# Altium PCB DRV8313.PcbDoc
Units mil, origin at the board's own origin, x right, y up, seen from the top; angles counter-clockwise.
Board outline 1771.56 x 1554.12 mil, 4 copper layers (Top Layer, VCC-2, GND-3, Bottom Layer), stack 46.063 mil thick; 72 components, 69 nets, 282 pads, 243 vias.
Unrouted connection lines stored in the file: 193.
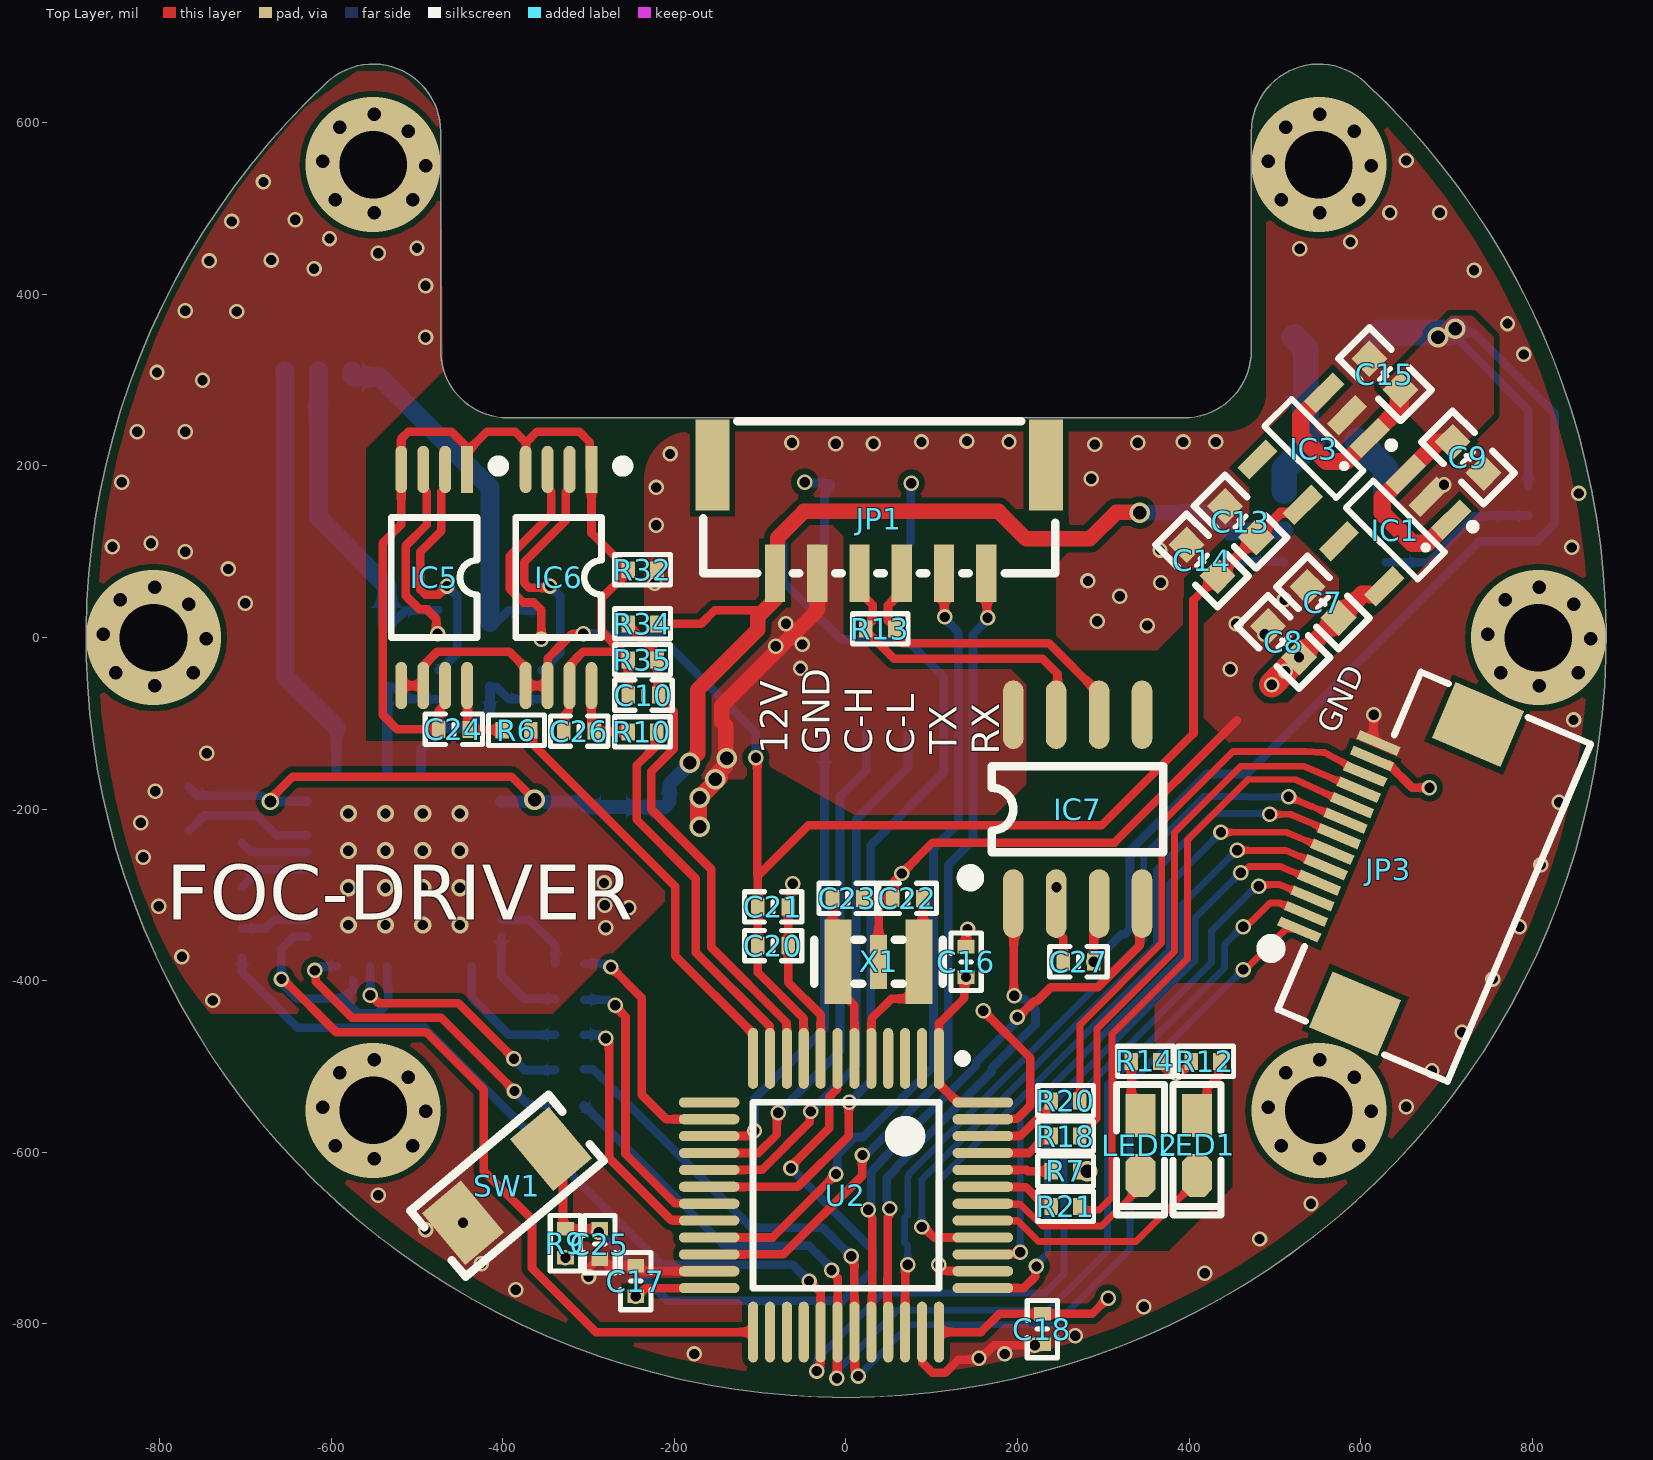
[diagram p0: Top Layer view]
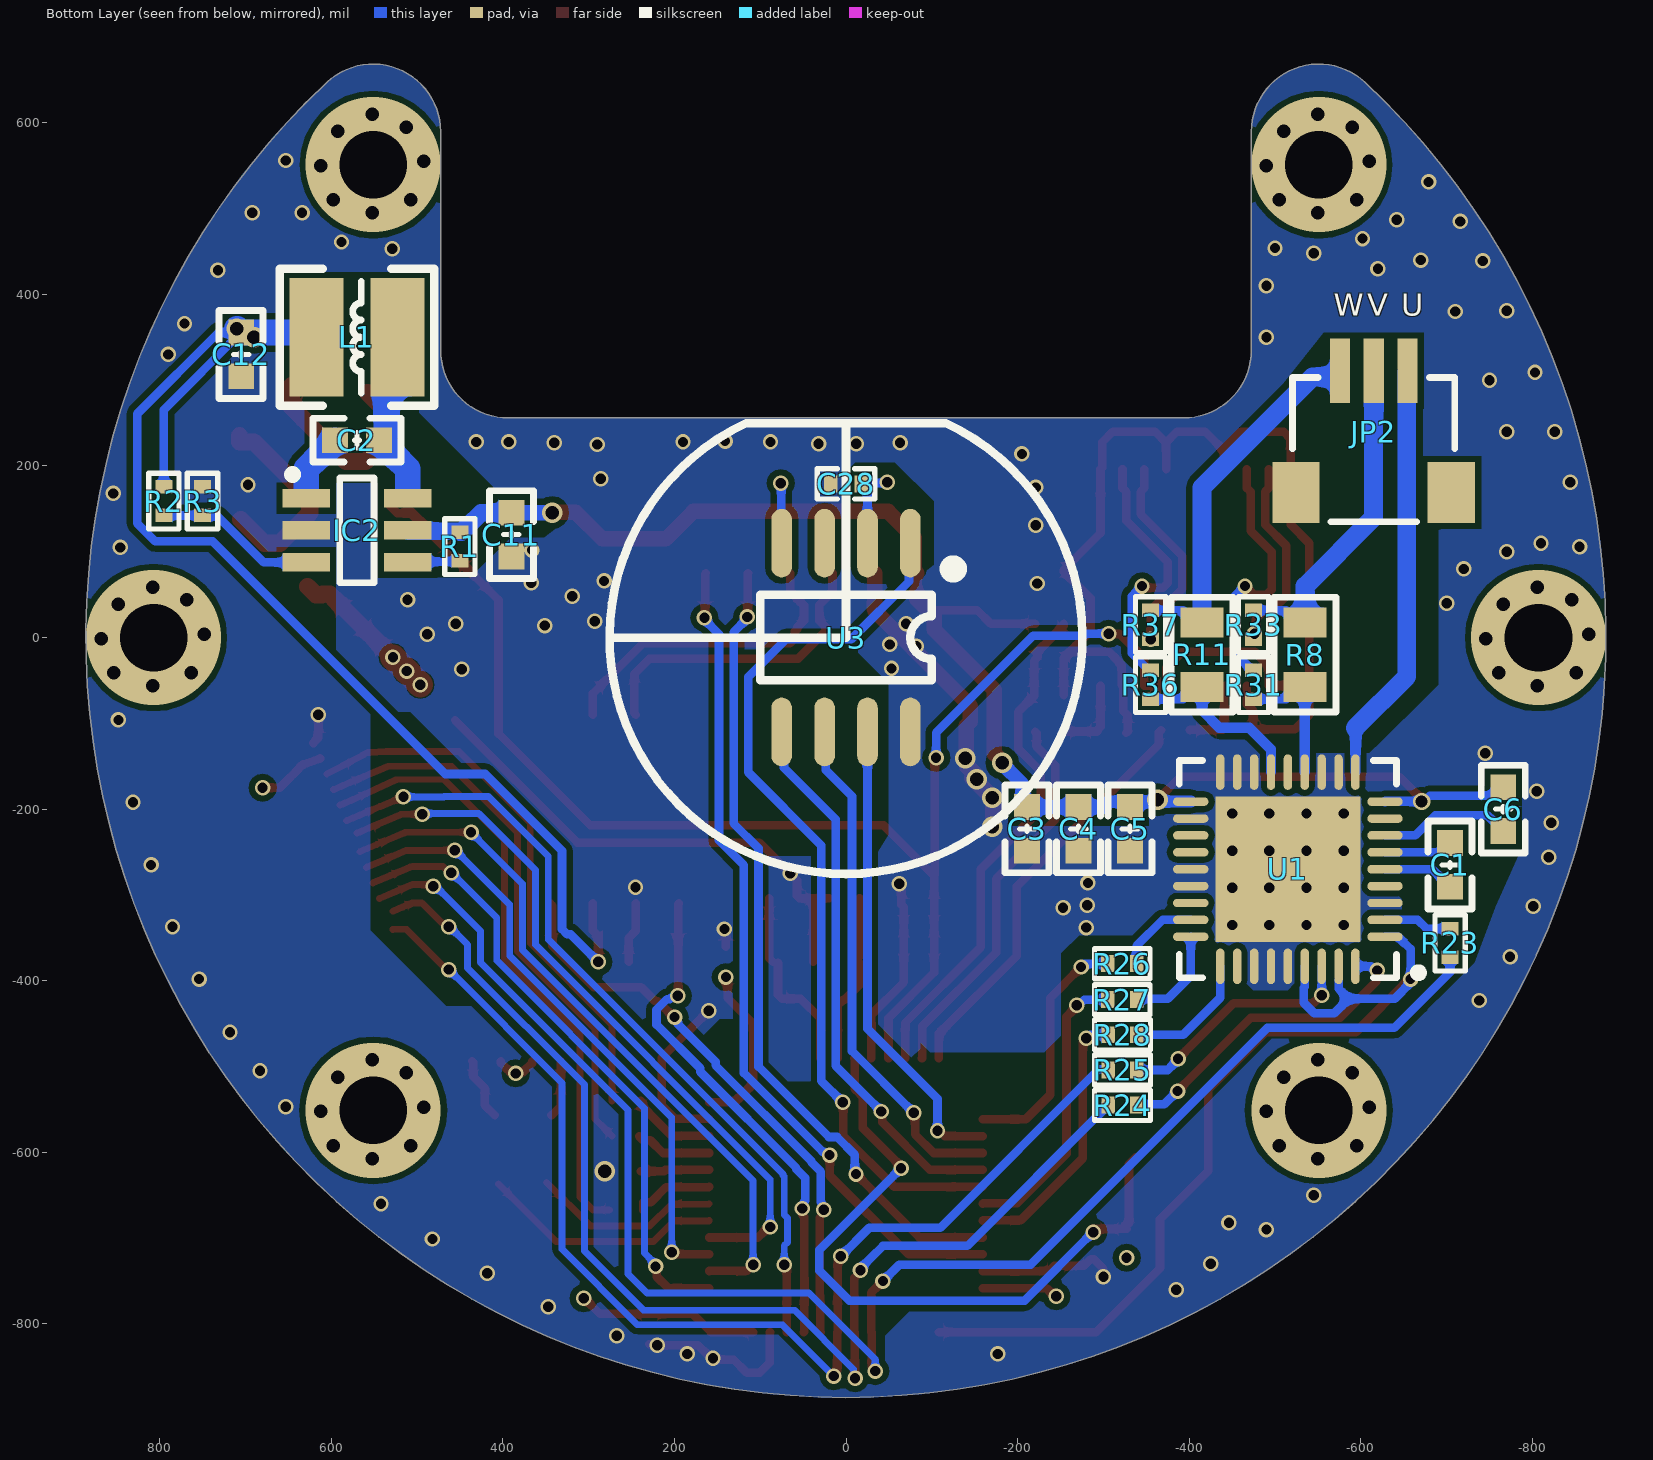
[diagram p1: Bottom Layer view, seen from below]
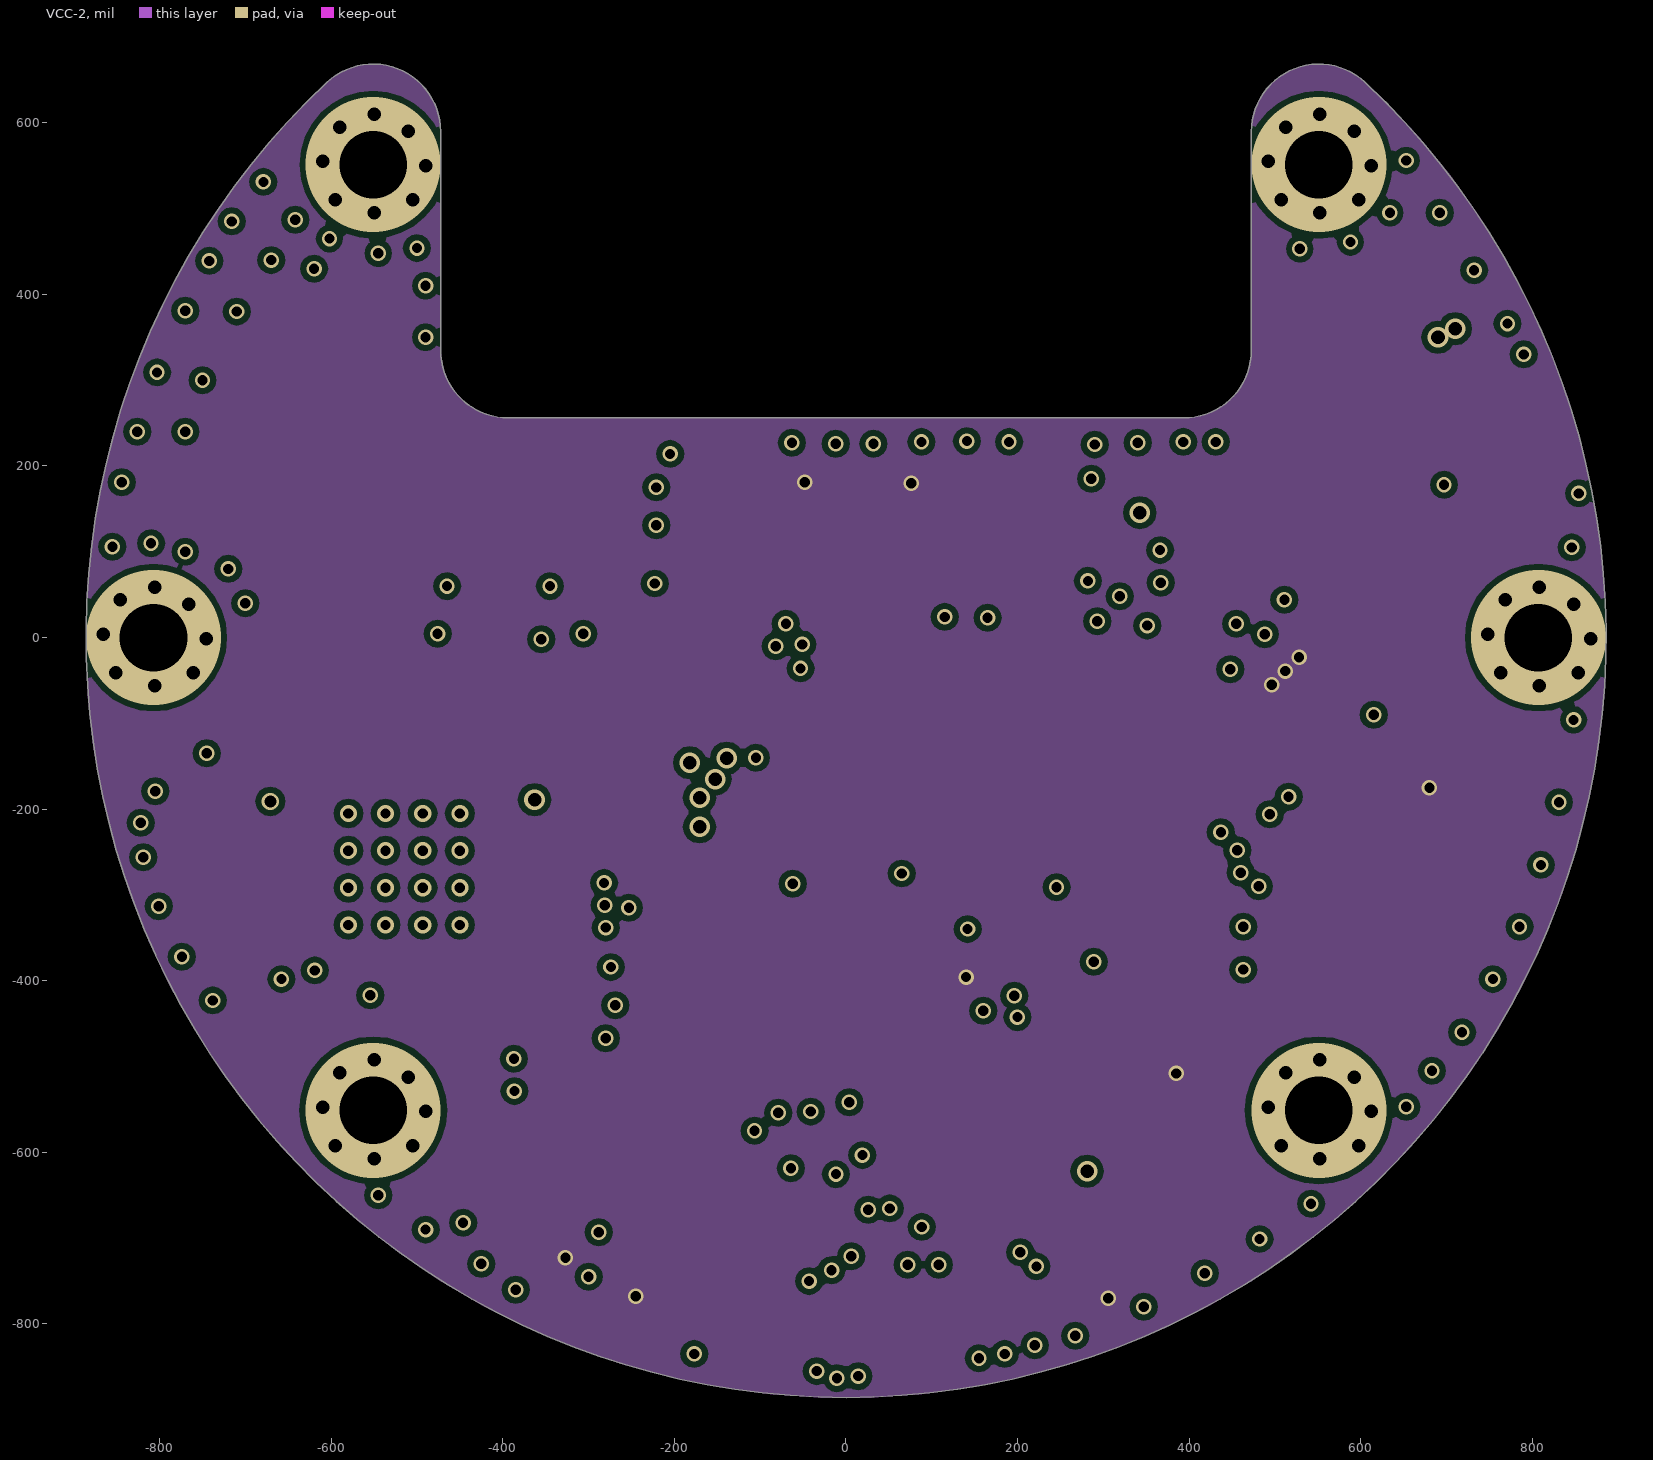
[diagram p2: VCC-2]
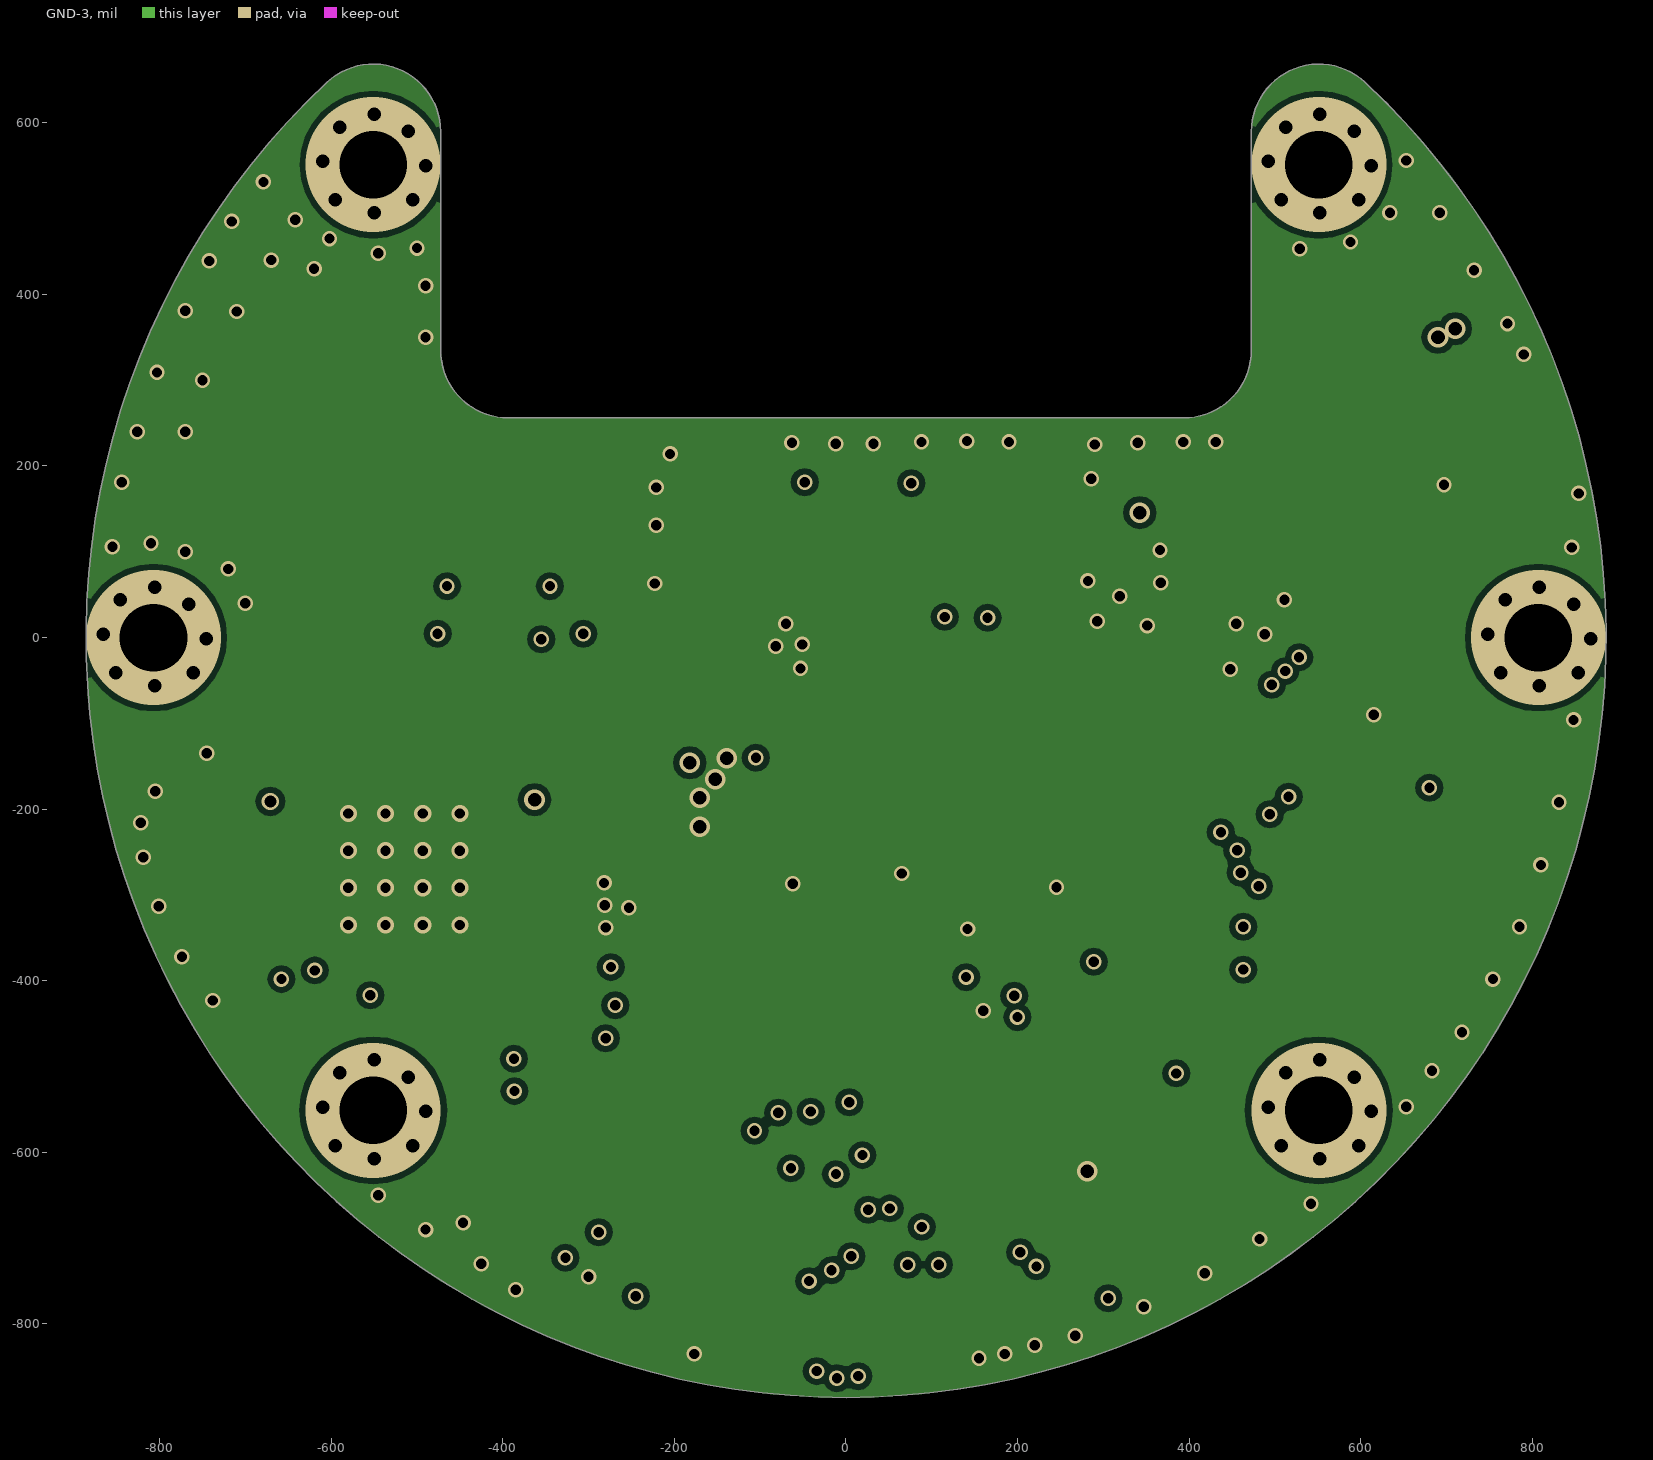
[diagram p3: GND-3]
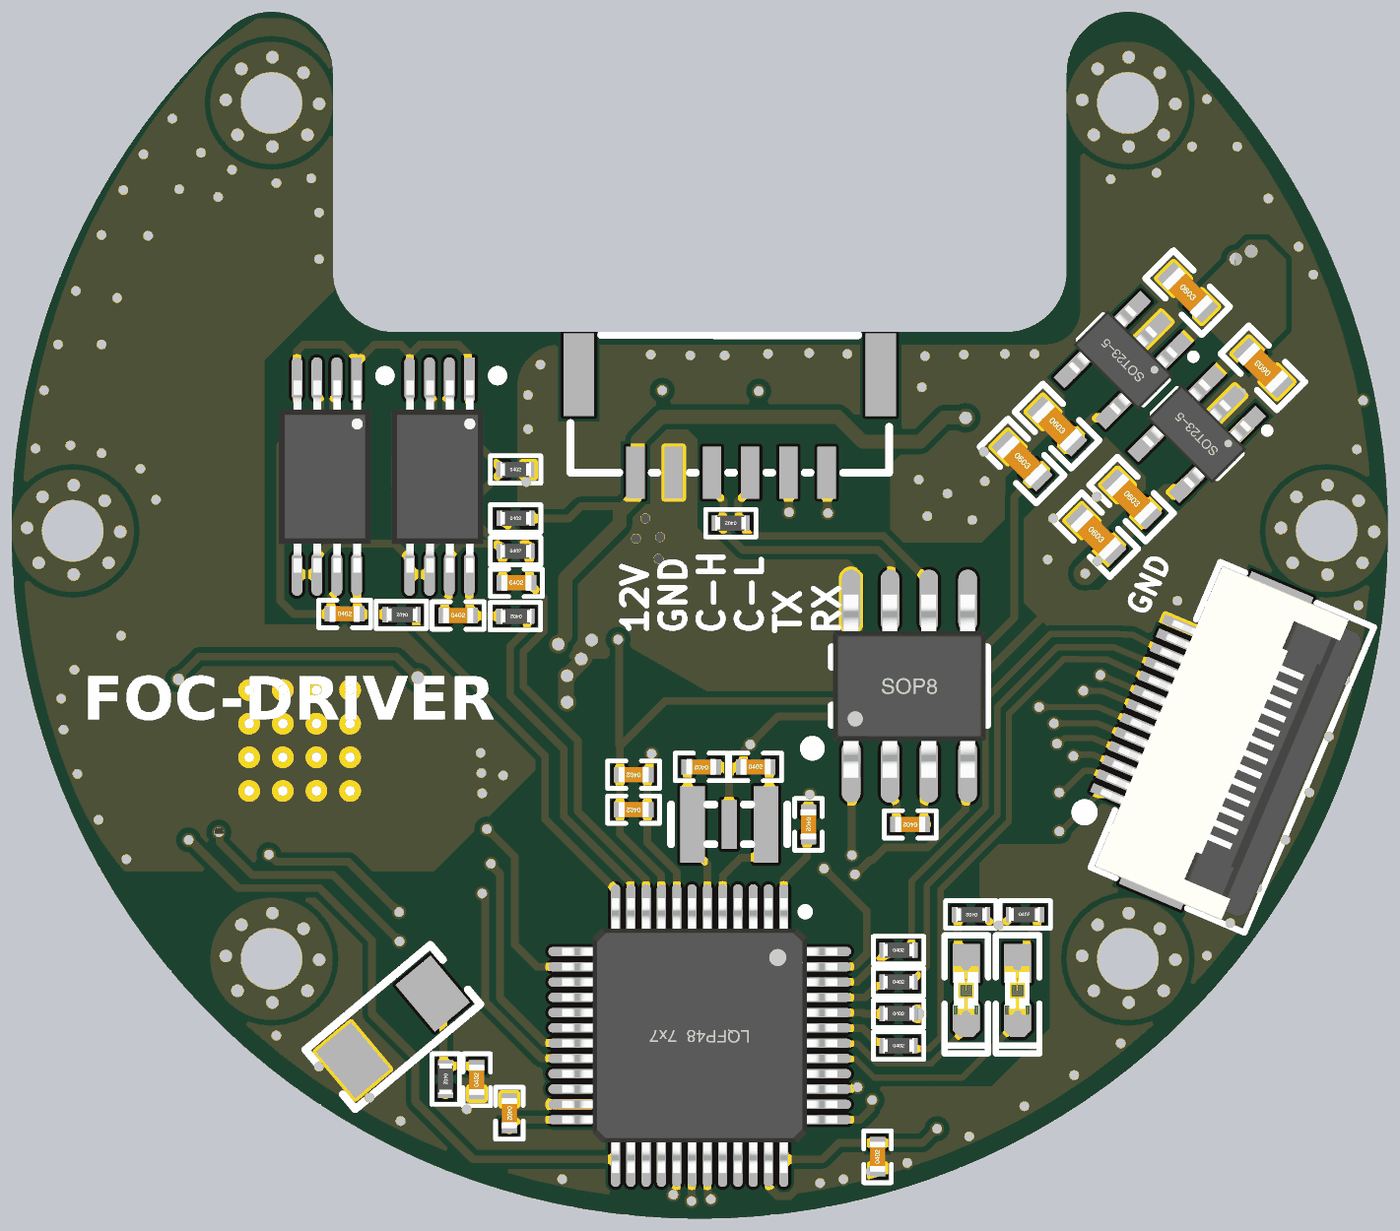
[diagram p4: 3D render of the assembled board from above, using the file's embedded part models]
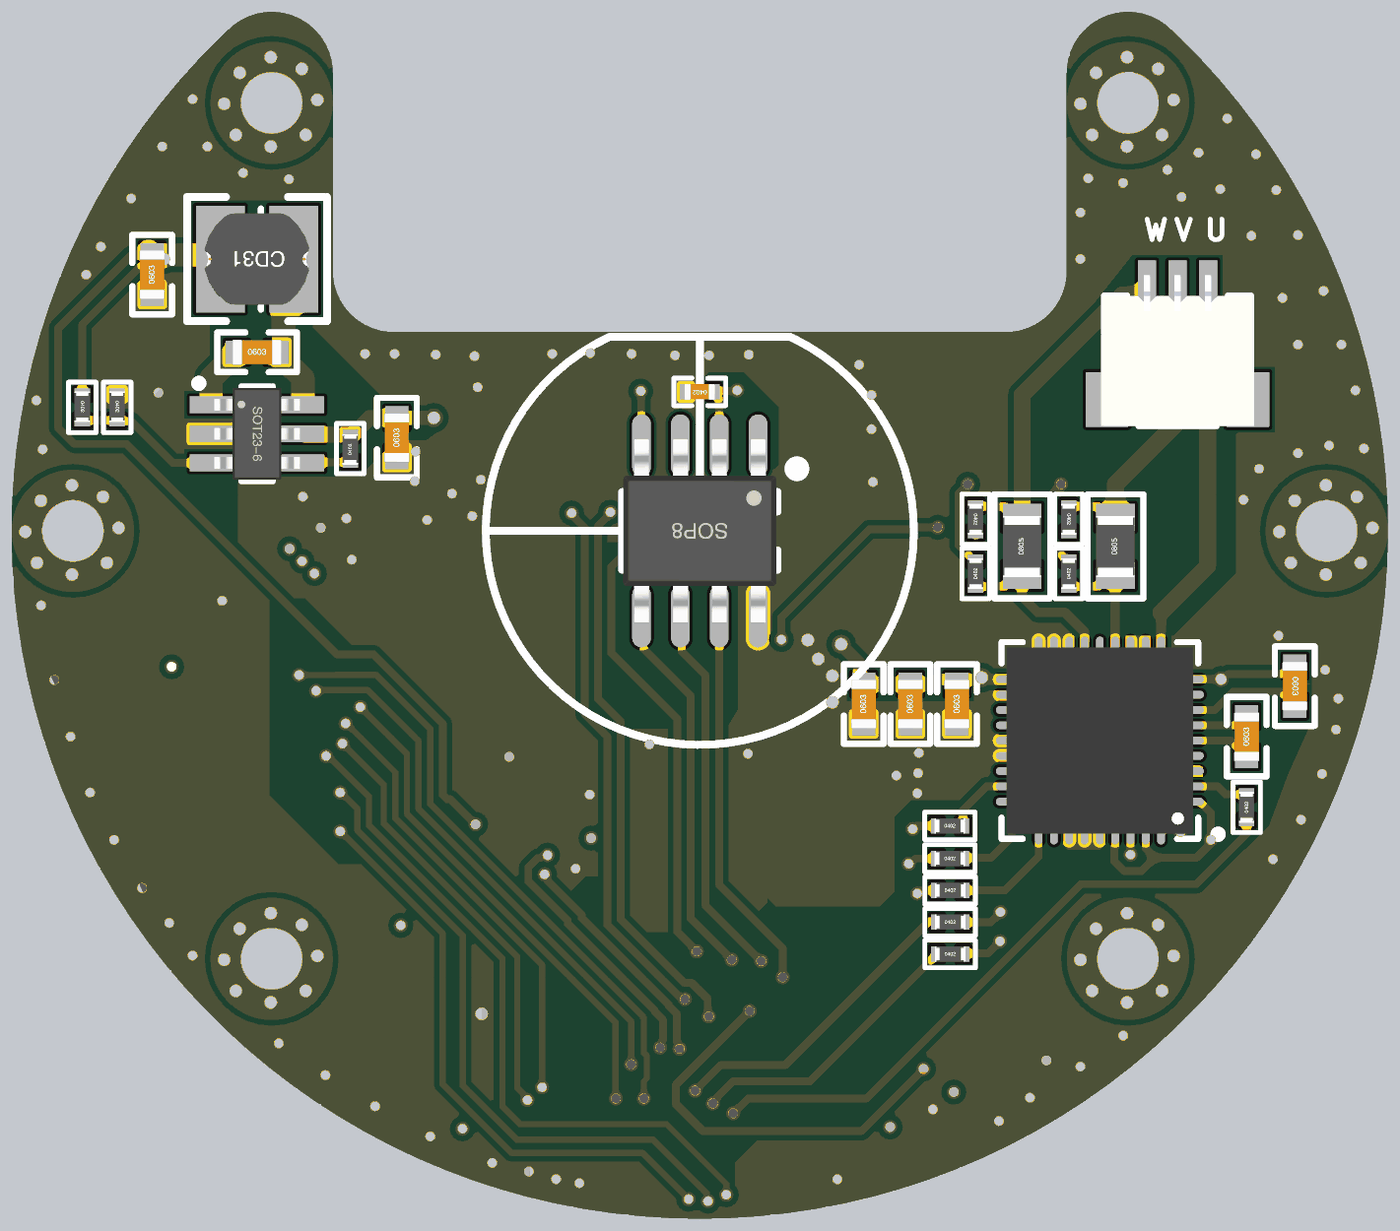
[diagram p5: 3D render of the assembled board from below, using the file's embedded part models]

## Layer stack, top to bottom
Top Solder: solder mask 0.4, Solder Resist, Dk 3.5
Top Layer: signal copper 1.378
Dielectric 2: prepreg 3.937, PP-006, Dk 4.1
VCC-2: signal copper 0.689
Dielectric 1: dielectric 34.0551, FR-4, Dk 4.8
GND-3: signal copper 0.689
Dielectric 3: prepreg 3.937, PP-006, Dk 4.1
Bottom Layer: signal copper 1.378
Bottom Solder: solder mask 0.4, Solder Resist, Dk 3.5

## Board outline
-393.62,255.98 cw(c-393.62,334.72) -472.36,334.72 -472.36,589.64 ccw(c-551.1,589.64) -604.88,647.16 ccw(c0.08,0.08) 605.03,647.16 ccw(c551.26,589.64) 472.52,589.64 472.52,334.72 cw(c393.78,334.72) 393.78,255.98

## Design rules (kind name [scope] priority, off if disabled: settings)
Clearance [All] p1: gap=7 ignorepadtopadclearanceinfootprint=FALSE
DiffPairsRouting DiffPair_DiffPairsRouting [InDifferentialPairClass('100om')] p1: maxlimit=8 minlimit=8 mostfreqgap=8 toplayer_minwidth=10 toplayer_maxwidth=10 toplayer_prefwidth=10 midlayer1_minwidth=10 midlayer1_maxwidth=10 midlayer1_prefwidth=10 midlayer2_minwidth=10 midlayer2_maxwidth=10 midlayer2_prefwidth=10 bottomlayer_minwidth=10 bottomlayer_maxwidth=10 bottomlayer_prefwidth=10 maxuncoupledlength=500
DiffPairsRouting [All] p2: maxlimit=10 minlimit=10 mostfreqgap=10 toplayer_minwidth=15 toplayer_maxwidth=15 toplayer_prefwidth=15 midlayer1_minwidth=15 midlayer1_maxwidth=15 midlayer1_prefwidth=15 midlayer2_minwidth=15 midlayer2_maxwidth=15 midlayer2_prefwidth=15 bottomlayer_minwidth=15 bottomlayer_maxwidth=15 bottomlayer_prefwidth=15 maxuncoupledlength=500
MatchedLengths DiffPair_MatchedLengths [InDifferentialPair ('ADC_U')] p1: tolerance=1000 checknetsindiffpair=FALSE checkdiffpairvsdiffpair=TRUE checkxsignals=TRUE checkothers=TRUE
MatchedLengths [InDifferentialPair ('ADC_U')] p2: tolerance=1000 checknetsindiffpair=FALSE checkdiffpairvsdiffpair=TRUE checkxsignals=TRUE checkothers=TRUE
PolygonConnect [InNetClass('All Nets')] p1: connectstyle=Direct reliefconductorwidth=10 reliefentries=4 polygonreliefangle="90 Angle" airgapwidth=10
RoutingVias [All] p1: holewidth=28 width=50 viastyle="Through Hole" minholewidth=12 minwidth=12 maxholewidth=800 maxwidth=800
SolderMaskExpansion [All] p1: expansion=4
Width [All] p1: maxlimit=100 minlimit=8 preferedwidth=10
29 further rules are at their usual default settings.

## Components (designator, comment, footprint, x,y, rotation, side; value= is the part's Value field where it differs from the comment)
C1 "10nF" C0603_L -704,-265 r90 bottom
C2 "104" C0603_L 570,230 r180 bottom
C3 "10uF" C0603_L -211,-223 r90 bottom
C4 "104" C0603_L -271,-223 r90 bottom
C5 "104" C0603_L -331,-223 r90 bottom
C6 "104" C0603_L -766,-200 r270 bottom
C7 "1uF" C0603_L 556,41 r315 top
C8 "104" C0603_L 510,-5 r315 top
C9 "1uF" C0603_L 725,210 r135 top
C10 "104" C0402_L -236,-67 r0 top
C11 "4.7uF" C0603_L 390,120 r90 bottom
C12 "10uF" C0603_L 705,330 r90 bottom
C13 "1uF" C0603_L 460,135 r315 top
C14 "104" C0603_L 415,90 r315 top
C15 "1uF" C0603_L 628.1,306.9 r315 top
C16 "104" C0402_L 140,-378 r270 top
C17 "104" C0402_L -245,-750 r270 top
C18 "104" C0402_L 229,-806 r90 top
C20 "104" C0402_L -85,-359 r180 top
C21 "10uF" C0402_L -85,-314 r180 top
C22 "20pF" C0402_L 72,-304 r0 top
C23 "20pF" C0402_L 2,-304 r180 top
C24 "2.2nF" C0402_L -457,-107 r0 top
C25 "104" C0402_L -287,-707 r90 top
C26 "2.2nF" C0402_L -311,-109 r0 top
C27 "104" C0402_L 271,-378 r180 top value=20pF
C28 "104" C0402_L 0,179 r0 bottom value=20pF
IC1 "ME6211C33M5G-N" SOT23-5N 640,125 r135 top
IC2 "JW5026" SOT23-6M 570,125 r270 bottom
IC3 "ME6211C33M5G-N" SOT23-5N 545,220 r135 top
IC5 "INA240A2PWR" TSSOP8_N -480,70 r270 top
IC6 "INA240A2PWR" TSSOP8_N -335,70 r270 top
IC7 "TJA1050" SOP8_N 270,-200 r90 top
JP1 "HDR-1X6" GH-1.25-6P -82.64,75 r0 top
JP2 "CON-3P" SH1.0-WT-3P -615,240 r180 bottom
JP3 "HDR-1X13" FPC0.5-WT-13P 665,-270 r67 top locked
L1 "4.7uH" CD31 570,350 r0 bottom
LED1 "LED" "LED 0603B" 409,-592 r270 top
LED2 "LED" "LED 0603B" 343,-592 r270 top
R1 "100K" "R 0402_L" 450,105 r90 bottom
R2 "11.2K" "R 0402_L" 795,160 r270 bottom
R3 "2.1K" "R 0402_L" 750,160 r270 bottom
R6 "20" "R 0402_L" -383,-108 r180 top
R7 "10K" R0402_L 256,-622 r0 top
R8 "0.05mR" R0805_L -535,-20 r90 bottom
R9 "10K" R0402_L -327,-706 r270 top
R10 "20" "R 0402_L" -236.29,-110 r180 top
R11 "0.05mR" R0805_L -415,-20 r90 bottom
R12 "2K" "R 0402_L" 418,-494 r0 top
R13 "120" R0402_L 40,10 r180 top
R14 "2K" "R 0402_L" 350,-494 r180 top
R18 "1K" R0402_L 256,-581 r0 top
R20 "1K" R0402_L 256,-540 r0 top
R21 "1K" R0402_L 256,-663 r0 top
R23 "20R" R0402_L -704,-356 r90 bottom
R24 "20R" R0402_L -322.27,-545 r180 bottom
R25 "20R" R0402_L -322.27,-504 r180 bottom
R26 "20R" R0402_L -322,-380 r180 bottom
R27 "20R" R0402_L -322,-422 r180 bottom
R28 "20R" R0402_L -322.27,-463 r180 bottom
R31 "0R" R0402_L -475,-55 r90 bottom
R32 "0R" R0402_L -237,79 r0 top
R33 "0R" R0402_L -475,15 r270 bottom
R34 "10K" R0402_L -237,16 r0 top
R35 "10K" R0402_L -237,-26 r0 top
R36 "0R" R0402_L -355,-55 r90 bottom
R37 "0R" R0402_L -355,15 r270 bottom
SW1 "6x6x5" "TSW SMD-2.9*3.9*2" -395,-639 r220 top
U1 "Drv8313" VFQFPN36_N -515,-270 r0 bottom
U2 "STM32F103C8T6" LQFP48_N 0,-650 r270 top
U3 "MT6816" SOP8_N 0,0 r270 bottom locked
X1 "XTAL-3P" SMD3213-3P 38,-378 r180 top

## Footprints (in the part's own frame and the unit in brackets; to place one, negate y for a bottom-side part, rotate by r counter-clockwise, add the part's x,y. Pads: shape width x height; smd on the part's side, far side on the other; paste and mask are expansions set on the pad)
C0402_L [mm] "贴片MLCC电容"
  rect 0.4x0.5 smd: 1(-0.45,0) 2(0.45,0)
  silkscreen extent -0.85,-0.45 0.85,0.45, body extent -0.5,-0.26 0.5,0.26, height 0.54
C0603_L [mil] "贴片MLCC电容"
  rect 30x30 smd: 1(-25.59,0) 2(25.59,0)
  silkscreen extent -51,-26 51,26, body extent -31,-16 31,16, height 33
CD31 [mm] "3.5*3*1mm（长宽高）"
  rect 1.6x3.5 smd: 1(-1.2,0) 2(1.2,0)
  silkscreen extent -2.29,-2.03 2.29,2.03, body extent -1.72,-1.5 1.72,1.5, height 1.27
FPC0.5-WT-13P [mm] "长：10.7mm，宽：5.2mm，高：2mm"
  rect 1.8x2.2 smd: 0(-4.65,0) 0(4.65,0)
  rect 0.3x1.3 smd: 1(-3,2.497) 2(-2.5,2.497) 3(-2,2.497) 4(-1.5,2.497) 5(-1,2.497) 6(-0.5,2.497) 7(0,2.497) 8(0.5,2.497) 9(1,2.497) 10(1.5,2.497) 11(2,2.497) 12(2.5,2.497) 13(3,2.497)
  silkscreen extent -5.43,-3.3 5.43,3.23, body extent -5.35,-3.15 5.35,2.85, height 2
GH-1.25-6P [mm]
  rect 1x2.7 smd: 0(-1.85,3.201) 0(8.019,3.2)
  rect 0.6x1.7 smd: 1(0,0) 2(1.25,0) 3(2.5,0) 4(3.75,0) 5(5,0) 6(6.25,0)
  silkscreen extent -2.12,0 8.29,4.5
"LED 0603B" [mil] "蓝色0603LED"
  rect 50x35 smd: 1(-35,0.26)
  oct 50x35 smd: 2(35,0.26)
  silkscreen extent -71,-28 81,28, body extent -31,-16 32,16, height 24
LQFP48_N [mm] "Thin QFP, 48-Leads, Body 7x7mm, Pitch 0.5mm, IPC Medium Density封装库来自淘宝 ID：黄晶宝石"
  oval 1.8x0.3 smd: 1(-4.05,2.75) 2(-4.05,2.25) 3(-4.05,1.75) 4(-4.05,1.25) 5(-4.05,0.75) 6(-4.05,0.25) 7(-4.05,-0.25) 8(-4.05,-0.75) 9(-4.05,-1.25) 10(-4.05,-1.75) 11(-4.05,-2.25) 12(-4.05,-2.75) 25(4.05,-2.75) 26(4.05,-2.25) 27(4.05,-1.75) 28(4.05,-1.25) 29(4.05,-0.75) 30(4.05,-0.25) 31(4.05,0.25) 32(4.05,0.75) 33(4.05,1.25) 34(4.05,1.75) 35(4.05,2.25) 36(4.05,2.75)
  oval 0.3x1.8 smd: 13(-2.75,-4.05) 14(-2.25,-4.05) 15(-1.75,-4.05) 16(-1.25,-4.05) 17(-0.75,-4.05) 18(-0.25,-4.05) 19(0.25,-4.05) 20(0.75,-4.05) 21(1.25,-4.05) 22(1.75,-4.05) 23(2.25,-4.05) 24(2.75,-4.05) 37(2.75,4.05) 38(2.25,4.05) 39(1.75,4.05) 40(1.25,4.05) 41(0.75,4.05) 42(0.25,4.05) 43(-0.25,4.05) 44(-0.75,4.05) 45(-1.25,4.05) 46(-1.75,4.05) 47(-2.25,4.05) 48(-2.75,4.05)
  silkscreen extent -4.17,-2.75 2.75,3.58, body extent -4.5,-4.5 4.5,4.5, height 1.45
R0402_L [mm] "1/16W贴片电阻"
  rect 0.4x0.5 smd: 1(-0.425,0) 2(0.425,0)
  silkscreen extent -0.82,-0.45 0.83,0.45, body extent -0.5,-0.25 0.5,0.25, height 0.3
R0805_L [mil] "1/8W贴片电阻"
  rect 35x50 smd: 1(-37.4,0) 2(37.4,0)
  silkscreen extent -67,-36 67,36, body extent -39,-25 39,25, height 20
"R 0402_L" [mm] "1/16W贴片电阻"
  rect 0.4x0.5 smd: 1(-0.4,0) 2(0.45,0)
  silkscreen extent -0.8,-0.45 0.85,0.45, body extent -0.5,-0.25 0.5,0.25, height 0.3
SH1.0-WT-3P [mm] "SH1.0连接器-卧贴-3P                 联系卖家 免费查找封装"
  rect 1.4x1.8 smd: 0(-2.3,-1.8) 0(2.3,-1.8)
  rect 0.6x1.9 smd: 1(1,1.8) 2(0,1.8) 3(-1,1.8)
  silkscreen extent -2.4,-2.67 2.4,1.6, body extent -2.5,-2.66 2.5,2.29, height 2.9
SMD3213-3P [mm]
  rect 0.8x2.5 smd: 1(-1.2,0) 3(1.2,0)
  rect 0.5x1.6 smd: 2(0,0)
  silkscreen extent -1.9,-0.65 1.9,0.65
SOP8_N [mil] "5*6*1.8mm（长宽高）"
  oval 80x24 smd: 1(-110,75) 2(-110,25) 3(-110,-25) 4(-110,-75) 5(110,-75) 6(110,-25) 7(110,25) 8(110,75)
  silkscreen extent -86,-100 50,131, body extent -118,-98 118,98, height 75
SOT23-5N [mm] "3x1.6x1.1mm(长宽高)"
  rect 0.5x1.2 smd: 1(-0.95,-1.4) 2(0,-1.4) 3(0.95,-1.4) 4(0.95,1.4) 5(-0.95,1.4)
  silkscreen extent -1.63,-1.78 1.5,0.56, body extent -1.5,-1.4 1.5,1.4, height 1.15
SOT23-6M [mm] "3x1.6x1.1mm(长宽高)"
  rect 0.55x1.4 smd: 1(-0.95,-1.5) 2(0,-1.5) 3(0.95,-1.5) 4(0.95,1.5) 5(0,1.5) 6(-0.95,1.5)
  silkscreen extent -1.78,-2.03 1.55,0.51, body extent -1.5,-1.4 1.5,1.4, height 1.15
TSSOP8_N [mm] "3*6.4*1.2mm（长宽高）"
  rect 1.4x0.35 smd: 1(-3.2,0.975)
  oval 1.4x0.35 smd: 2(-3.2,0.325) 3(-3.2,-0.325) 4(-3.2,-0.975) 5(3.2,-0.975) 6(3.2,-0.325) 7(3.2,0.325) 8(3.2,0.975)
  silkscreen extent -3.43,-1.27 1.78,2.03, body extent -3.14,-1.57 3.14,1.43, height 1.09
"TSW SMD-2.9*3.9*2" [mm]
  rect 1.5x2 smd: 1(-1.7,0) 2(1.7,0)
  silkscreen extent -2.67,-1.27 2.67,1.27, body extent -2.67,-1.11 2.67,1.27, height 0.25
VFQFPN36_N [mm] "QFN, 36-Leads, Body 6x6mm, Pitch 0.5mm, Thermal Pad 4.3x4.3mm, IPC Medium Density"
  oval 1.05x0.25 smd: 1(-2.875,2) 2(-2.875,1.5) 3(-2.875,1) 4(-2.875,0.5) 5(-2.875,0) 6(-2.875,-0.5) 7(-2.875,-1) 8(-2.875,-1.5) 9(-2.875,-2) 19(2.875,-2) 20(2.875,-1.5) 21(2.875,-1) 22(2.875,-0.5) 23(2.875,0) 24(2.875,0.5) 25(2.875,1) 26(2.875,1.5) 27(2.875,2)
  oval 0.25x1.05 smd: 10(-2,-2.875) 11(-1.5,-2.875) 12(-1,-2.875) 13(-0.5,-2.875) 14(0,-2.875) 15(0.5,-2.875) 16(1,-2.875) 17(1.5,-2.875) 18(2,-2.875) 28(2,2.875) 29(1.5,2.875) 30(1,2.875) 31(0.5,2.875) 32(0,2.875) 33(-0.5,2.875) 34(-1,2.875) 35(-1.5,2.875) 36(-2,2.875)
  rect 4.3x4.3 smd: 37(0,0)
  silkscreen extent -3.99,-3.21 3.21,3.21, body extent -3.06,-3.06 3.06,3.06

## Part data
C1 C2 C3 C4 C5 C6 C7 C8 C9 C10 C11 C12 C13 C14 C15 C16 C17 C18 C20 C21 C22 C23 C24 C25 C26: library part C, "贴片电容/MLCC电容"
C27 C28: library part Capacitor, "Capacitor"
IC2: library part "JW5026 40V 1A"
IC5 IC6: "运放芯片"
IC7: "CAN总线收发芯片"
JP1: library part "Header 6", "6P连接器", BOM名称=6P连接器, 联系卖家 免费技术支持=·â×°¿âÀ´×ÔÌÔ±¦Âô¼ÒID£º»
JP2: library part "Header 3", "3P连接器"
JP3: library part "Header 13", "13P连接器", BOM名称=13P连接器, 联系卖家 免费技术支持=·â×°¿âÀ´×ÔÌÔ±¦Âô¼ÒID£º»
L1: library part L-CDRH, "功率屏蔽电感"
LED1 LED2: "发光二极管"
R1 R2 R3 R6 R7 R9 R10 R12 R13 R14 R18 R20 R21 R34 R35: library part R, "贴片电阻"
  R1 R2 R3 R6 R10 R12 R14: BOM名称=贴片电阻
R8 R11: library part R-I, "电流检测电阻"
R23 R24 R25 R26 R27 R28 R31 R32 R33 R36 R37: library part RES_R, "10K"
SW1: library part "TSW SMD-6x6", "贴片6x6轻触开关", BOM名称=贴片6x6轻触开关
U2: "STM32 ARM-based 32-bit MCU Performance Line with 64 kB Flash, 20 kB Internal RAM, -40 to +85癈 Temperature, 48-Pin LQFP, Tray"
X1: "三脚无源晶振"

## Via types
v1: diameter 18, hole 12, Top Layer to Bottom Layer, tented both sides, 162 vias
v2: diameter 24, hole 15.75, Top Layer to Bottom Layer, tented both sides, 58 vias
v3: diameter 20, hole 12, Top Layer to Bottom Layer, 16 vias
v4: diameter 157.48, hole 78.74, Top Layer to Bottom Layer, tented both sides, 6 vias
v5: diameter 20, hole 14, Top Layer to Bottom Layer, tented both sides, 1 vias

## Nets (pads, with @x,y where several pads share a name; then routed paths per layer and width w, separated by ;. In a path a pad name is that pad's centre, name@x,y a point inside that pad or via, vN(x,y) a via of type N, cw(c..) or ccw(c..) an arc to the next point about the centre after c; other vN are vias at no path point)
+5V: C9.2 C12.2 C15.2 C27.1 IC1.1 IC1.3 IC3.1 IC3.3 IC7.3 L1.2 R2.1 | length 1957.6
  Top Layer w10: v1(288.72,-378) 288.72,-348.07 295,-341.79 IC7.3
  Top Layer w20: IC3.3 530,257.89 530,235 560,205 582.89,205 IC3.1 646.19,268.3 C15.2@646.19,293.76 ; IC1.1 677.89,110 660,110 625,145 625,162.89 690.2,228.1 C9.2 C9.2@706.91,235.17
  Bottom Layer w10: v1(288.72,-378) 321.03,-345.69 325.14,-345.69 331,-339.83 331,-248.37 420.37,-159 467,-159 738,112 805,112 826,133 826,260.85 731.27,355.59 C12.2 795,265.58 R2.1
  Bottom Layer w30: L1.2 622.83,355.59 C12.2 709.41,360 v2(710,360)
  other v2: 690,350
AGND: C10.1 C24.1 C26.1 IC5.1 IC5.4 IC5.7 IC6.1 IC6.4 IC6.7 R32.1 R35.1 | length 1282.8
  Top Layer w10: IC5.7 -467.2,-77.68 -474.72,-85.19 C24.1 -523,-107 -540,-90 -540,110 -518.39,131.61 IC5.4 -518.39,231.61 -510,240 -460,240 -443.5,223.5 -443.5,197.87 IC5.1 -441.61,216.65 -418.27,240 -385.78,240 -373.39,227.61 IC6.4 ; IC6.4@-372.89,217.15 -372.89,227.11 -360,240 -311,240 -298.5,227.5 -298.5,197.87 IC6.1 -296.61,121.88 R32.1@-258.57,83.84 ; C26.1@-326.53,-111.19 C26.1 -328.16,-108.44 -328.16,-90.63 -322.93,-85.4 -322.93,-56.71 -321.48,-55.26 -321.48,-31.48 -306.43,-16.43 R35.1@-261.34,-16.43 ; R35.1 -253.73,-24.03 R35.1@-261.34,-16.43 ; R32.1 -253.73,77.03 -285,45.76 -285,7.24 R35.1@-261.34,-16.43 ; C10.1 R35.1
AVCC: C13.2 C14.2 C20.2 C21.2 IC3.5 IC5.5 IC5.6 IC6.5 IC6.6 U2.9 | length 1873.2
  Top Layer w10: IC5.5@-519.11,-55.26 IC5.5 IC5.6 -492.8,-34.29 -490.91,-32.4 -490.91,-30.91 -476.43,-16.43 -392.28,-16.43 -373.39,-35.32 IC6.5 IC6.6 -347.8,-24.3 -333.11,-9.61 -319.58,3.92 -306.86,3.92 v1(-306.21,4.57) ; v1(-105,-140) -103.47,-141.53 -103.47,-276.96 -102.71,-277.71 ; U2.9 -49.56,-490.2 -49.56,-443.66 -102.71,-390.5 C20.2 C21.2 -102.71,-277.71 ; C14.2 405,43.81 405,-111.96 297.96,-219 -44,-219 -102.71,-277.71 ; IC3.5@515.09,145.62 515.88,144.84 522.73,144.84 IC3.5
  Top Layer w12: C14.2 C13.2 506.81,145.62 IC3.5@515.09,145.62
  Bottom Layer w10: v1(-306.21,4.57) -306.14,4.5 -279.71,4.5 -277.21,2 -218,2 -105,-111 v1(-105,-140)
CAN_H: IC7.7 JP1.3 R13.2 | length 369.1
  Top Layer w10: JP1.3 15.79,53.35 31,38.13 31,19.7 23.27,11.97 23.27,8.03 55.9,-24.6 229,-24.6 246.61,-42.21 246.61,-88.39 IC7.7
CAN_L: IC7.6 JP1.4 R13.1 | length 373.7
  Top Layer w10: JP1.4 65,53.35 49,37.35 49,19.7 56.73,11.97 R13.1 59.61,7.13 59.61,-0.74 65.46,-6.6 236.46,-6.6 295,-65.14 IC7.6
CAN_RX: IC7.4 U2.32 | length 657.4
  Top Layer w10: U2.32 29.87,-809.1 29.87,-778.29 30.37,-777.8 30.37,-739.59 30.8,-739.16 30.8,-676.46 ; v1(199.84,-442.35) 200.99,-442.35 219.41,-423.93 222.43,-423.93 238.71,-407.65 293.75,-407.65 342.32,-359.08 342.32,-312.68 IC7.4
  Bottom Layer w10: v1(26.05,-667.06) 27.58,-665.53 27.58,-659.87 29.53,-657.93 29.53,-622.49 39.8,-612.21 39.8,-610.9 152,-498.7 152,-494.42 195.84,-450.59 195.84,-448.51 199.84,-444.51 v1(199.84,-442.35)
CAN_TX: IC7.1 U2.33 | length 590
  Top Layer w10: U2.33 48.87,-809.1 48.87,-778.29 48.37,-777.8 48.37,-747.05 48.8,-746.62 48.8,-674.9 51.07,-672.63 51.07,-665.51 v1(51,-665.44) ; IC7.1 195.5,-310.5 195.5,-417.14 v1(196,-417.64)
  Bottom Layer w10: v1(51,-665.44) 49.47,-663.91 49.47,-658.25 47.53,-656.31 47.53,-629.94 57.8,-619.67 57.8,-618.36 170,-506.16 170,-501.88 220.84,-451.04 220.84,-433.65 208.53,-421.35 205.36,-421.35 203.19,-419.17 197.53,-419.17 v1(196,-417.64)
DCBUS: C3.2 C4.2 C5.2 C6.1 C11.2 IC2.5 JP1.1 R1.2 R34.2 U1.9 U1.19 | length 1787.9
  Top Layer w10: v5(-671,-191) -671,-188.29 -644.71,-162 -390,-162 v2(-363,-189) ; R34.2 -168.69,16 -152.69,32 -103.98,32 ; JP1.1@-82.64,53.35 JP1.1
  Top Layer w18: v2(-182,-146) -182,-144.38 -173,-135.38 -173,-61 -103,9 -103,26.17 ; -103,24.03 -82.64,44.39 JP1.1@-82.64,53.35 ; JP1.1 -79.83,77.81 -79.83,116.17 -49,147 178,147 210,115 284,115 315,146 v2@338.76,146
  Bottom Layer w10: C6.1 -756,-184.41 -680.3,-184.41
  Bottom Layer w11: v5(-671,-191) -628.45,-191 U1.9
  Bottom Layer w14: U1.19 -306.69,-191.26
  Bottom Layer w16: -306.69,-191.26 -300.54,-197.41 C4.2 C3.2 -205.61,-192.02 -205.61,-170.86 v2@-181.38,-146.62
  Bottom Layer w18: v2(342.41,145.59) C11.2
  Bottom Layer w20: C11.2 425.15,145.59 448.03,122.71 R1.2 451.14,123.86 509.8,123.86 IC2.5
DCBUS_ADC: C10.2 R34.1 R35.2 U2.10 | length 604.9
  Top Layer w10: R34.1 -253.73,14.03 -223.14,-16.56 -223.14,-23.13 R35.2 -219.28,-26.99 -219.28,-67.98 -200.66,-86.6 -200.66,-129.7 -227,-156.04 -227,-200 -157,-270 -157,-361 -69.24,-448.76 -69.24,-490.2 U2.10
DRV_EN: U1.1 U1.33 U1.35 U2.25 | length 1098.8
  Top Layer w10: v1(-658,-398) -656.04,-398 -594.04,-460 -489,-460 -422,-527 -422,-622 -366,-678 -366,-735 -291.55,-809.45 U2.25
  Bottom Layer w10: U1.1 -643.78,-348.74 -658,-362.96 v1(-658,-398) -658,-402.44 -639.44,-421 -586,-421 ; U1.35@-574.13,-398.86 -574.13,-409.13 -586,-421 ; U1.33 -534.69,-407.07 -533.45,-408.3 -533.45,-425.7 -545.75,-438 -569,-438 -586,-421
GND: C3.1 C4.1 C5.1 C7.1 C8.1 C9.1 C11.1 C12.1 C13.1 C14.1 C15.1 C16.1 C17.1 C18.1 C20.1 C21.1 C22.1 C23.1 C25.1 C27.2 C28.2 IC1.2 IC2.2 IC3.2 IC7.2 IC7.8 JP1.2 JP3.13 R3.1 R7.2 R32.2 SW1.2 U1.3 U1.11 U1.12 U1.16 U1.17 U1.18 U1.20 U1.23 U1.24 U1.30 U1.31 U1.32 U1.37 U2.8 U2.23 U2.35 U2.47 U3.8 X1.2 | length 1874.8
  Top Layer w8: R7.2 v2(281,-622)
  Top Layer w10: v1(-300,-745) -300,-735.75 -288.97,-724.72 C25.1 -285.03,-724.72 -277.46,-732.28 C17.1 -243.03,-732.28 -236.73,-738.58 U2.23 ; v2@-149.82,-158.53 -149.82,-161.54 v2@-147.68,-163.68 ; v2@-141.68,-150.39 -141.68,-143.27 v2(-139,-140.59) ; v1(-62,-287) -62,-289.16 -64.41,-291.57 -64.41,-311.13 C21.1 C20.1 -67.28,-401.89 -29.53,-439.65 U2.8 ; C23.1 38,-304 ; X1.2 38,-304 ; U2.35 88.93,-809.8 88.93,-844.96 100.85,-856.88 115.68,-856.88 131.04,-841.53 153.47,-841.53 v1(155,-840) 157.16,-840 172.16,-825 218.72,-825 220,-823.72 C18.1 ; C16.1 140,-342 v1@142,-340 ; U2.47 159.8,-561.07 198.93,-561.07 215,-545 215,-490 v1(160,-435) ; IC7.2 245,-341.79 253.29,-350.08 C27.2 ; 455.62,-96.38 313,-239 101,-239 v1(65,-275) 57.16,-282.84 57.16,-301.13 C22.1 38,-304 ; v1(615,-90) 615,-117.21 JP3.13
  Top Layer w18: v2(-139,-140.59) -140.15,-139.45 -140.15,-102.85 -145,-98 -145,-80 -78.5,-13.5 -33.42,31.58 JP1.2
  Top Layer w20: v2@-172,-222 -172,-188 v2@-147.68,-163.68 ; v2@-149.82,-158.53 v2@-141.68,-150.39
  other v1: -177,-835 185,-835 220,-825 267.21,-813.92 347,-780 -385,-760 418,-741 -425,-730 482,-701 -490,-690 -446.27,-682.02 542,-660 -545,-650 653,-547 683,-505 718,-460 -738,-423 754,-398 -774,-372 141.72,-339.7 -280,-338 785,-337 -253,-315 -801,-313 -281,-312 245.39,-290.98 -282,-286 810,-265 -819,-256 -822,-216 831,-192 -805,-179 -745,-135 848,-96 448,-37 -53,-36 -82,-10 -51,-8 488,4 351,14 -70,16 455,16 293,19 -700,40 511,44 319,48 -223,63 367,64 282,66 -720,80 -770,100 366,102 846,105 -855,106 -810,110 -221,131 854,168 -221,175 697,178 -844,181 286,185 -205,214 290,225 -12,226 32,226 -63,227 340,227 88,228 190,228 393,228 431,228 141,229 -826,240 -770,240 -750,300 -803,309 790,330 -490,350 771,366 -710,380 -770,381 -490,410 732,428 -620,430 -742,439 -670,440 -545,448 529,453 -500,454 588,461 -602,465 -716,485 -642,487 634,495 692,495 -679,531 653,556
  other v2: -170.66,-220.66 -170.66,-186.66 -152.5,-165
  other v3: -579.96,-334.96 -536.65,-334.96 -493.35,-334.96 -450.04,-334.96 -579.96,-291.65 -536.65,-291.65 -493.35,-291.65 -450.04,-291.65 -579.96,-248.35 -536.65,-248.35 -493.35,-248.35 -450.04,-248.35 -579.96,-205.04 -536.65,-205.04 -493.35,-205.04 -450.04,-205.04
IN1: JP3.3 R23.1 U2.29 | length 1896.3
  Top Layer w8: v1@483,-288 502.76,-288 505.24,-288 ccw(c508.59,-280.73) 507.41,-288.65 523.87,-295.63 JP3.3
  Top Layer w10: v1(-43,-750) -29.53,-763.47 U2.29 -29.87,-809.8 -29.87,-848.53 -34.09,-852.75 v1(-34.09,-854.92) ; v1(481,-290) v1@483,-288
  Bottom Layer w8: v1(-34.09,-854.92) -34.03,-854.86 -34.03,-841.03 43,-764 231.81,-764 254,-741.81 254,-550.85 426,-378.85 426,-342 v1@479.5,-288.5
  Bottom Layer w10: R23.1 -704,-390 -639,-455 -491,-455 -215,-731 -62,-731 v1(-43,-750)
IN2: JP3.2 R24.1 U2.30 | length 1403.3
  Top Layer w8: v1(463,-337) 465.71,-337 470.71,-332 471.67,-332 494.48,-309.19 504.89,-309.19 516.09,-313.95 JP3.2@528,-319
  Top Layer w10: v1(-16.84,-737.33) -16.84,-739.49 -9.84,-746.49 U2.30 -10.18,-809.78 -10.18,-862.89 v1(-10.51,-863.23)
  Bottom Layer w8: v1(-10.51,-863.23) -8.98,-861.69 -8.98,-852.98 60,-784 235.85,-784 305,-714.85 305,-521.07 441,-385.07 441,-358 v1@462,-337
  Bottom Layer w10: R24.1 -305.54,-546.97 -302.66,-549.84 -300.69,-549.84 -141.54,-709 -43,-709 -29.19,-722.81 -16.84,-735.17 v1(-16.84,-737.33)
IN3: JP3.1 R25.1 U2.31 | length 1388.5
  Top Layer w8: v1(463,-387) 465.4,-387 512.4,-340 528.05,-340 JP3.1
  Top Layer w10: v1(6,-721) 6,-723.16 9.84,-727.01 U2.31 10.19,-809.8 10.19,-854.42 14.37,-858.6 v1(14.37,-860.77)
  Bottom Layer w8: v1(14.37,-860.77) 74.13,-801 242.9,-801 331,-712.9 331,-519 v1(463,-387)
  Bottom Layer w10: R25.1@-305.54,-503 -295,-503 -110,-688 -27,-688 v1(6,-721)
KEY_1: R18.1 U2.45 | length 89.8
  Top Layer w10: U2.45 213.18,-600.79 228.13,-585.84 236.39,-585.84 240.88,-581.35 R18.1@240.88,-581
KEY_2: R20.1 U2.46 | length 99.6
  Top Layer w10: U2.46 159.8,-580.76 203.29,-580.76 236.39,-547.65 236.39,-542.87 R20.1
M_U: JP2.1 U1.10 | length 492.8
  Bottom Layer w12: U1.10 -593.74,-105.26
  Bottom Layer w22: JP2.1 -653.56,310.05 -653.56,-45.44 -593.74,-105.26
M_V: R8.1 R31.1 U1.13 | length 165.5
  Bottom Layer w10: R8.1 -527.5,-57.4 -513.18,-71.73 R31.1
  Bottom Layer w12: R8.1 -534.69,-57.72 U1.13
M_V_ADC: R6.1 U2.12 | length 490
  Top Layer w10: R6.1 -364.66,-110.58 -364.66,-124.34 -199,-290 -199,-371 -109.88,-460.12 -109.66,-460.12 -108.27,-461.51 U2.12
M_V_OUT: JP2.2 R8.2 R33.1 | length 392.5
  Bottom Layer w10: R8.2 -527.5,17.4 -513.17,31.73 R33.1
  Bottom Layer w22: JP2.2 -615,140 -535,60 R8.2
M_W: R11.1 R36.1 U1.15 | length 219.1
  Bottom Layer w10: R11.1 -407.5,-57.4 -393.18,-71.73 R36.1
  Bottom Layer w12: U1.15 -495.24,-156.73 -495.24,-130.24 -470,-105 -435,-105 -415,-85 R11.1
M_W_ADC: R10.1 U2.11 | length 454.6
  Top Layer w10: R10.1 -222.23,-111.7 -222.23,-127.23 -244,-149 -244,-212 -175,-281 -175,-367.04 -88.93,-453.11 -88.93,-490.2 U2.11
M_W_OUT: JP2.3 R11.2 R37.1 | length 444.2
  Bottom Layer w10: R11.2 -407.5,17.4 -393.17,31.73 R37.1
  Bottom Layer w22: JP2.3 -575.63,304.52 -574.82,303.71 -543.71,303.71 -415,175 R11.2
NetC1_1: C1.1 U1.5 | length 84.3
  Bottom Layer w10: C1.1 -683.41,-270 U1.5
NetC1_2: C1.2 U1.6 | length 80.3
  Bottom Layer w10: C1.2 -694,-249.41 -688.97,-249.41 -688.07,-250.32 U1.6
NetC2_1: C2.1 IC2.1 | length 72.9
  Bottom Layer w30: C2.1 629.06,196.54 IC2.1@629.06,171
NetC2_2: C2.2 IC2.6 L1.1 | length 201.9
  Bottom Layer w30: IC2.6@510.94,170.93 510.94,188 510.94,196.53 C2.2 536,238.41 536,336.76 L1.1
NetC6_2: C6.2 U1.7 | length 155
  Bottom Layer w10: C6.2@-765.78,-225.37 -747.41,-207 -687,-207 -663.37,-230.63 U1.7
NetC22_2: C22.2 U2.5 X1.1 | length 220.6
  Top Layer w10: U2.5 29.87,-490.2 29.87,-444.13 53,-421 74.5,-421 79.24,-416.25 X1.1@79.24,-379 ; X1.1 89.71,-373.53 C22.2
NetC23_2: C23.2 U2.6 X1.3 | length 199.6
  Top Layer w10: C23.2 -15.71,-371.53 X1.3 ; X1.3@-15.24,-379 -15.24,-405.46 1.5,-422.21 3.21,-422.21 9.84,-428.84 U2.6
NetC24_2: C24.2 IC5.8 R6.2 | length 91
  Top Layer w10: IC5.8 -440.89,-56.71 -440.89,-105.4 C24.2 -438.79,-107.5 -401.21,-107.5 R6.2
NetC25_2: C25.2 R9.1 SW1.1 U2.7 | length 801.7
  Top Layer w10: SW1.1@-337.73,-605.98 -329.83,-613.87 -329.83,-682.39 -326.95,-685.28 R9.1@-324.99,-685.28 ; R9.1 C25.2 ; v1(-64.13,-618.43) -64.13,-616.27 -19.52,-571.66 -19.52,-535.39 -11.62,-527.5 ; -11.62,-527.46 -10.19,-526.03 -10.19,-490.9 U2.7
  Bottom Layer w10: v1(-288,-693) -208,-773 -4.04,-773 31,-737.96 31,-713.56 v1(-64.13,-618.43)
NetC26_2: C26.2 IC6.8 R10.2 | length 94.1
  Top Layer w10: IC6.8 -296.61,-103.71 -293.29,-107.03 C26.2 -292.79,-109.5 -254.5,-109.5 R10.2
NetIC2_3: IC2.3 R2.2 R3.2 | length 188.6
  Bottom Layer w10: IC2.3 678.6,87.6 732.18,141.18 748.9,141.18 R3.2 R2.2
NetIC2_4: IC2.4 R1.1 | length 61.6
  Bottom Layer w10: R1.1 450.82,88.42 510.12,88.42 IC2.4
NetIC5_2: IC5.2 R31.2 | length 303.1
  Top Layer w10: IC5.2 -467.2,174.29 -471.5,170 -471.5,124.56 -496,100.06 -496,55.86 -490.14,50 -474.86,50 -465,59.86 v1(-465,60)
  Bottom Layer w10: R31.2 -473.03,-38.27 -453.16,-18.39 -453.16,48.16 v1(-465,60)
NetIC5_3: IC5.3 R33.2 | length 223.7
  Top Layer w10: IC5.3 -492.8,174.29 -488.5,170 -488.5,131.6 -513,107.1 -513,48.82 -497.18,33 -488.56,33 -477.53,21.97 -477.53,6.11 v1(-476,4.57)
NetIC6_2: IC6.2 R36.2 | length 300.9
  Top Layer w10: v1(-345,60) -347.16,60 -349.33,57.84 -369.14,57.84 -375,63.69 -375,87.96 -326.5,136.46 -326.5,170 -322.2,174.29 IC6.2
  Bottom Layer w10: R36.2 -353.03,-38.27 -333.16,-18.39 -333.16,48.16 v1(-345,60)
NetIC6_3: IC6.3 R37.2 | length 242.4
  Top Layer w10: v1(-355.1,-1.9) -355,-1.8 -355,32 -363.84,40.84 -376.18,40.84 -392,56.65 -392,95 -343.5,143.5 -343.5,170 -347.8,174.29 IC6.3
NetJP3_9: JP3.9 R21.2 | length 720.9
  Top Layer w8: R21.2@275.61,-667.21 294.94,-667.21 310,-652.14 310,-462 398,-374 398,-236 468.87,-165.13 524.16,-165.65 525.66,-166.35 570.94,-187.3 JP3.9
NetJP3_10: JP3.10 R18.2 | length 651.7
  Top Layer w8: R18.2 292.61,-561.13 292.61,-456.39 383,-366 383,-227 460,-150 533.44,-150 534.94,-150.64 577.71,-168.79 JP3.10
NetJP3_11: JP3.11 R20.2 | length 641.5
  Top Layer w8: R20.2 272.73,-451.3 368,-356.03 368,-216 451.23,-132.77 536.12,-132.77 555.74,-133.8 557.51,-133.89 585.68,-148.89 586.14,-148.92 587.33,-149.55 JP3.11
NetLED1_1: LED1.1 R12.2 | length 74
  Top Layer w10: LED1.1 420.98,-545.28 420.98,-525.02 434.39,-511.61 434.39,-495.33 R12.2
NetLED2_1: LED2.1 R14.2 | length 67.5
  Top Layer w10: R14.2 332.29,-546.03 LED2.1
NetR7_1: R7.1 U2.44 | length 80.5
  Top Layer w10: U2.44 210.47,-620.47 212,-622 R7.1
NetR23_2: R23.2 U1.2 | length 80
  Bottom Layer w10: R23.2 -676.57,-339.27 -666.36,-329.06 U1.2
NetR24_2: R24.2 U1.36 | length 379.7
  Top Layer w10: v1(-619,-388) -618,-389 -618,-401 -576,-443 -472,-443 v1(-386.43,-528.57)
  Bottom Layer w10: v1(-619,-388) -616.84,-388 -612.02,-383.19 U1.36 ; v1@-386.97,-528.03 -371,-544 R24.2@-339,-544
NetR25_2: R25.2 U1.34 | length 283.5
  Top Layer w10: v1(-554.45,-417) -553.59,-417 -544.59,-426 -452,-426 v1(-387,-491)
  Bottom Layer w10: v1(-554.45,-417) v1(-554.45,-417) U1.34 U1.34 ; v1@-386,-493 -375,-504 R25.2
NetR26_2: R26.2 U1.26 | length 96.3
  Bottom Layer w10: U1.26 -368.94,-329.06 -338.73,-359.27 R26.2
NetR27_2: R27.2 U1.27 | length 120
  Bottom Layer w10: U1.27 -401.81,-394.19 -375,-421 -339.73,-421 R27.2
NetR28_2: R28.2 U1.28 | length 151.7
  Bottom Layer w10: U1.28 -436.26,-419.74 -393,-463 R28.2
nFAULT: R28.1 U2.20 | length 315.4
  Top Layer w10: v1(-280,-467) -276,-471 -276,-606.85 -203.67,-679.18 -159.8,-679.18 U2.20
  Bottom Layer w10: R28.1 -284,-463 v1(-280,-467)
nRESET: R26.1 U2.14 | length 287.1
  Top Layer w10: v1(-274,-384) -238,-420 -238,-532.83 -209.42,-561.42 U2.14
  Bottom Layer w10: R26.1 -278,-380 v1(-274,-384)
nSLEEP: R27.1 U2.19 | length 338.5
  Top Layer w10: v1@-271.12,-427.88 -257,-442 -257,-601.81 -199.32,-659.5 -159.8,-659.5 U2.19
  Bottom Layer w10: R27.1 -278,-422 v1@-271,-429
  other v1: -268.88,-428.68
SPI_CLK: U2.15 U3.7 | length 554.1
  Top Layer w10: U2.15 -115,-581.1 -108.77,-574.88 v1(-106.61,-574.88)
  Bottom Layer w10: v1(-106.61,-574.88) -106.61,-537.61 -25,-456 U3.7
SPI_CS: U2.18 U3.1 | length 1048.9
  Top Layer w10: U2.18 -56.16,-640.16 3.13,-580.87 3.13,-542.41 v1(3.9,-541.64)
  Bottom Layer w10: U3.1 -73.41,108.41 -73.41,65.41 -6,-2 70,-2 114,-46 114,-157 29,-242 29,-516.54 v1(3.9,-541.64) v1@2.37,-540.1
SPI_MISO: U2.16 U3.6 | length 600.7
  Top Layer w10: U2.16 -102.26,-600.79 -80.53,-579.06 -80.53,-555.53 v1(-79,-554)
  Bottom Layer w10: v1(-79,-554) -7,-482 -7,-185 23.41,-154.59 23.41,-111.59 U3.6
SPI_MOSI: U2.17 U3.5 | length 643.6
  Top Layer w10: U2.17 -97.9,-620.47 -42.45,-565.01 -42.45,-553.75 v1(-41.11,-552.41)
  Bottom Layer w10: v1(-41.11,-552.41) 12,-499.3 12,-212 72.32,-151.68 72.32,-112.68 U3.5
SYS_BLED: LED2.2 U2.42 | length 221.5
  Top Layer w8: U2.42 160.18,-660.57 203.57,-660.57 228.99,-686 298,-686 LED2.2@349,-635
SYS_JTCK-SWCLK: JP3.4 U2.37 | length 734.8
  Top Layer w8: v1(460,-274) 462.69,-274 469.69,-267 505.16,-267 508.29,-267.64 531.56,-277.51 JP3.4
  Top Layer w10: U2.37 207.14,-758.27 220.47,-744.94 220.47,-734.53 v1(222,-733)
  Bottom Layer w8: v1(222,-733) 222,-730.29 235,-717.29 235,-548.64 407,-376.64 407,-327 v1(460,-274)
SYS_JTDI: JP3.6 U2.38 | length 829.3
  Top Layer w8: v1(437,-227) 511.69,-227 513.32,-227 514.79,-227.62 cw(c511.69,-235) 514.86,-227.65 546.94,-241.27 JP3.6
  Top Layer w10: v1(108,-731) 115.24,-738.24 159.1,-738.24 U2.38
  Bottom Layer w8: v1(108,-731) 108.35,-730.65 108.35,-632.86 377,-364.21 377,-287 v1(437,-227)
SYS_JTDO-TRACESWO: JP3.5 U2.39 | length 725.7
  Top Layer w8: v1(456,-248) 510.79,-248 512.42,-248 539.25,-259.39 JP3.5
  Top Layer w10: U2.39 159.8,-718.55 199.02,-718.55 200.95,-716.61 v1(203.12,-716.61)
  Bottom Layer w8: v1(203.12,-716.61) 203.12,-559.31 392,-370.43 392,-311 455,-248 v1(456,-248)
SYS_JTMS-SWDIO: JP3.8 U2.34 | length 942.3
  Top Layer w8: v1(515.87,-185.65) 543.37,-196.99 563.25,-205.42 JP3.8
  Top Layer w10: U2.34 68.9,-734.1 v1(72,-731)
  Bottom Layer w8: v1(72,-731) 72,-708.83 68.35,-705.18 68.35,-676.38 72,-672.72 72,-628.1 73.35,-626.75 73.35,-625.44 347,-351.79 347,-255 416.54,-185.46 468.69,-185.46 468.88,-185.65 v1(515.87,-185.65)
SYS_NJTRST: JP3.7 U2.40 | length 845.7
  Top Layer w8: v1(494,-206) 516.54,-206 519,-206.35 555.24,-221.73 JP3.7@570,-228
  Top Layer w10: v1(88.35,-687) 90.51,-687 102.73,-699.21 U2.40
  Bottom Layer w8: v1(88.35,-687) 88.35,-631.65 362,-358 362,-271 428,-205 493,-205 v1(494,-206)
SYS_RLED: LED1.2 U2.41 | length 283.4
  Top Layer w8: U2.41 159.8,-679.87 200.24,-679.87 224.37,-704 338,-704 LED1.2@405,-637
Test_PIN: R21.1 U2.43 | length 93.4
  Top Layer w10: U2.43 159.8,-640.5 209.74,-640.5 227.39,-658.16 236.39,-658.16 R21.1@236.39,-667.16
UART_RX: JP1.6 U2.22 | length 982.2
  Top Layer w10: U2.22 -72.9,-718.9 18.84,-627.16 18.84,-603.47 v1(19.16,-603.16) ; JP1.6 164.21,74.21 164.21,23.79 v1(165,23)
  Bottom Layer w10: v1(19.16,-603.16) 21.32,-603.16 25.32,-599.16 27.5,-599.16 119,-507.67 119,-265.33 148,-236.33 148,3.84 165,20.84 v1(165,23)
UART_TX: JP1.5 U2.21 | length 950.3
  Top Layer w10: U2.21 -85.51,-699.21 -30.83,-644.52 v1(-11.65,-625.35) ; JP1.5 114.61,74.61 114.61,24.39 v1(115,24)
  Bottom Layer w10: v1(-11.65,-625.35) -10.12,-623.82 -10.12,-602.74 10.46,-582.16 19.84,-582.16 102,-500 102,-245.59 131,-216.58 131,6.06 115,22.06 v1(115,24)
VCC_3V3: C7.2 C8.2 C16.2 C17.2 C18.2 C28.1 IC1.5 JP3.12 R9.2 R12.1 R14.1 U2.1 U2.24 U2.36 U2.48 U3.2 U3.4 | length 987.9
  Top Layer w10: v1(-245,-767.71) -243.03,-767.71 -233.59,-758.27 U2.24 ; U2.36 157.49,-809.45 178.65,-788.29 C18.2 286.71,-788.29 v1@305,-770 ; v1(140,-395.71) 138.03,-397.68 138.03,-419.97 108.27,-449.73 108.27,-520.08 129.92,-541.73 U2.48 ; R14.1 365.75,-495.97 376.26,-506.47 383.47,-506.47 v1(385,-508) 386.53,-506.47 391.75,-506.47 402.25,-495.97 R12.1 ; v1@495,-55 v1(496.19,-55) ; JP3.12 632.27,-148.2 632.99,-147.99 660,-175 v1(680,-175)
  Top Layer w20: v1(528.09,-23.1) C7.2@570.56,19.37 ; C7.2@568.09,16.91 601.81,50.62 610.09,50.62 610.88,49.84 617.73,49.84 IC1.5
  Top Layer w30: v1(496.19,-55) v1(512.14,-39.05) v1(528.09,-23.1)
  Bottom Layer w10: v1(-48.16,180.97) -47.18,179.98 -18.7,179.98 C28.1 -17.72,177.03 -25,169.75 U3.2 ; U3.4 75.5,110.5 75.5,179.5 v1(76,180)
  other v1: 305.59,-770 -327,-722.73
pads on no net: IC1.4 IC3.4 IC7.5 JP1.0 JP2.0 JP3.0 U1.4 U1.8 U1.14 U1.21 U1.22 U1.25 U1.29 U2.2 U2.3 U2.4 U2.13 U2.26 U2.27 U2.28 U3.3
copper on no net:
  other v2: -550,-607.36 552.36,-607.36 -595,-592.36 -505,-592.36 507.36,-592.36 597.36,-592.36 -490,-552.36 612.36,-552.36 -610,-547.36 492.36,-547.36 -510,-512.36 592.36,-512.36 -590,-507.36 512.36,-507.36 -550,-492.36 552.36,-492.36 -805.91,-56.18 808.27,-56.18 -850.91,-41.18 -760.91,-41.18 763.27,-41.18 853.27,-41.18 -745.91,-1.18 868.27,-1.18 -865.91,3.82 748.27,3.82 -765.91,38.82 848.27,38.82 -845.91,43.82 768.27,43.82 -805.91,58.82 808.27,58.82 -550,495 552.36,495 -595,510 -505,510 507.36,510 597.36,510 -490,550 612.36,550 -610,555 492.36,555 -510,590 592.36,590 -590,595 512.36,595 -550,610 552.36,610
  other v4: -551.18,-551.18 551.18,-551.18 -807.09,0 807.09,0 -551.18,551.18 551.18,551.18

## Polygon pours and split planes (outlines as drawn)
GND on Top Layer "GND_L01_P006" (solid, remove dead copper, pour order 6): -672.32,-541.86 cw(c-671.39,-536.93) -676.1,-538.65 cw(c-623.65,-519.53) -636.17,-465.12 cw(c-623.65,-519.53) -636.12,-465.11 -636.17,-465.12 cw(c-635,-470) -635,-464.99 -352.08,-464.99 -235.01,-347.92 -235.01,185 cw(c-180,185) -180,240.02 445,240.02 ccw(c445,285) 489.98,285 489.98,590 cw(c535,590) 535,635.02 567.49,635.02 cw(c567.49,630) 568.44,634.92 cw(c547.74,527.67) 604.36,621.08 cw(c601.76,616.8) 605.27,620.38 cw(c0.08,2.32) 865.09,2.32 cw(c0.08,2.32)
GND on Top Layer "GND_L01_P005" (solid, remove dead copper, pour order 5): -835.88,-192.47 -764.01,-120.59 -159,-120.59 -119,-160.59 -119,-215.59 -342,-438.59 -740.1,-438.59 cw(c-440.69,-180.38)
GND on Top Layer "GND_L01_P010" (solid, remove dead copper, pour order 10): -815.25,-308.07 cw(c21.02,6.06) -628.92,618.94 -570,660 -540,660 cw(c-540,611.72) -505.86,645.86 -488.43,628.43 cw(c-527.22,589.64) -472.36,589.64 -470,310 -560,220 -560,-125.45
+5V on Top Layer "+5V_L01_P000" (solid, remove dead copper, pour order 0): 622.5,292.5 705,375 730,375 755,350 755,260 705,210
GND on Bottom Layer "GND_L04_P007" (solid, remove dead copper, pour order 7): -393.62,255.98 cw(c-393.62,334.72) -472.36,334.72 -472.36,589.64 ccw(c-551.1,589.64) -604.88,647.16 ccw(c0.08,0.08) 605.03,647.16 ccw(c551.26,589.64) 472.52,589.64 472.52,334.72 cw(c393.78,334.72) 393.78,255.98
GND on Bottom Layer "GND_L04_P004" (solid, remove dead copper, pour order 4): -836.87,-191.88 -765.01,-120 -150,-120 -120,-150 -120,-215 -343,-438 -741.09,-438 cw(c-441.68,-179.79)
GND on GND-3 "GND_L03_P009" (solid, remove dead copper, pour order 9): -393.62,255.98 cw(c-393.62,334.72) -472.36,334.72 -472.36,589.64 ccw(c-551.1,589.64) -604.88,647.16 ccw(c0.08,0.08) 605.03,647.16 ccw(c551.26,589.64) 472.52,589.64 472.52,334.72 cw(c393.78,334.72) 393.78,255.98
VCC_3V3 on VCC-2 "VCC_3V3_L02_P008" (solid, remove dead copper, pour order 8): -393.62,255.98 cw(c-393.62,334.72) -472.36,334.72 -472.36,589.64 ccw(c-551.1,589.64) -604.88,647.16 ccw(c0.08,0.08) 605.03,647.16 ccw(c551.26,589.64) 472.52,589.64 472.52,334.72 cw(c393.78,334.72) 393.78,255.98

## Other copper
Top Layer:
  pour cut-out: 622.5,292.5 705,210 701,206 684,206 630,152 630,133 669.01,93.99 684.53,93.99 514.82,-75.72 487.6,-75.72 487.6,-32.47 574.09,54.02 574.09,69.65 522.73,121.02 412.71,11 393.78,11 393.78,69.39 469.84,145.45 469.84,221.55 517.74,269.46 517.74,247.26 550,215 581,215 581,220 622,261
  pour cut-out: 305,-15 363,-15 396,18 403,11 403,-194
  pour cut-out: 210,-115 210,-171 171,-210 174,-213 308,-213 385,-136
  pour cut-out: 102,-427 194,-427 240,-473 232.26,-480.74 232.26,-585.84 100.84,-585.84 94,-579
  pour cut-out: 18.76,-408.76 -4,-386 -4,-233 251,-233 404,-80 462,-138 462,-180 451,-180 365,-266 365,-416.02 257.86,-523.16 224.16,-523.16 131.17,-430.17 33.43,-430.17
  pour cut-out: 360,-424 360,-471 366.16,-477.16 450.59,-477.16 450.59,-640.41 376,-715 282,-715 282,-501 344,-439
  pour cut-out: 225,-570 291.44,-570 298.78,-577.34 298.78,-647.5 288.12,-658.16 227.39,-658.16
  pour cut-out: 398,-236 424,-210 440,-210 497.86,-267.86 497.86,-364.95 459.82,-403 373,-403 370,-400
  pour cut-out: 150,-15 305,-15 335,-45 335,-127.37 345,-137.37 232.37,-137.37 210,-115 210,-55 191.83,-36.83 169.29,-36.83
  pour cut-out: 155,-412.43 146.68,-420.75 146.68,-430.17 -79.83,-430.17 -155,-355 -155,-272 -200,-227 -200,-180 -185,-165 -120,-165 -110,-155 -97.37,-155 -91.44,-149.06 45,-227 18.76,-242.76 18.76,-301.24 5,-315 5,-395 18.76,-408.76 86.24,-408.76 105,-390 105,-360 115,-370 155,-370 155,-379
  pour cut-out: -15,130 -3.02,118.02 -3.02,4.57 8.39,-6.84 236.21,-6.84 245.11,2.05 245.11,85.11 260,100 260,140 250,150 -5,150 -15,140
  pour cut-out: 210,-325 210,-335 225,-350
  pour cut-out: -125,-525 105,-525 125,-545 125,-775 -120.42,-775 -125,-770.42
Bottom Layer:
  pour cut-out: -34,-255 92,-255 137,-210 137,-32 119.24,-14.24 -10.24,-14.24 -49,-53 -49,-230
  pour cut-out: -556.82,355.27 -556.82,322.06 -525.76,291 -506,291
  pour cut-out: 338.63,126.59 348.05,136 423,136 434,125 434,85 442.81,76.19 521.81,76.19 527,71 526,70 438,70 391,117 352,117
  pour cut-out: -788,-196.41 -788,-245 -757,-314 -733,-379 -702,-410 -648,-356 -648,-232.85 -663.37,-230.63
  pour cut-out: -349.72,-175.41 -220.91,-175.41 -220.91,-207.32 -233,-219.41 -353,-219.41
  pour cut-out: 130,-445 147,-445 168,-466 129,-505 129,-487 124,-482
  pour cut-out: 561.25,425.9 578.75,425.9 586,418.65 586,278 634,278 636,276 631,271 631,216.73 594.5,180.23 523.23,180.23 476,133 431,133 400,164 498,262 498,309
  pour cut-out: 594.5,69.77 594.5,-21.5 689,73 689,81
  pour cut-out: 420,-429 466,-429 554,-341 554,-87 508,-87 436,-159
  pour cut-out: -76,-783 -45.25,-813.75 -45.25,-843.45 -27.45,-843.45 41,-775
  pour cut-out: -75,62.63 -25,62.63 -2.84,84.79 -2.84,195.84 -11,204 -57,204 -102,159 -102,85
  pour cut-out: -255,-460 -231,-484 -98,-484 -87,-473 -87,-479 -49,-517 77,-517 85,-525 85,-594.81 -36.09,-715.91 -54,-698 -191,-698 -191,-642 -277,-556
  pour cut-out: -522.45,-403.16 -514.61,-411 -474.59,-411 -467.17,-403.59 -467.17,-390.6 -423.58,-347 -272,-347 -251,-368 -251,-571 -295,-615 -350,-560 -395,-560 -504,-451 -534,-451
  pour cut-out: -690,125 -690,-55 -610,-135 -535,-135 -440,-40 -440,125

## Silkscreen, mask and mechanical layers (free items; w line width, h text height)
Top Overlay:
  text "GND" at 571,-114 h26 r65
  text "12V" at -68,-136 h32 r90
  text "GND" at -18.79,-136 h32 r90
  text "C-H" at 30.42,-136 h32 r90
  text "C-L" at 79.64,-136 h32 r90
  text "TX" at 128.85,-136 h32 r90
  text "RX" at 178.85,-136.79 h32 r90
  text "FOC-DRIVER" at -792.53,-350 h110
Bottom Overlay:
  lines w10: 0,249.77 0,0 275,0 ; -116.47,249.77 ccw(c0,0) 116.47,249.77 -116.47,249.77
  text "U" at -647,375 h26
  text "V" at -607.63,375 h26
  text "W" at -568.26,375 h26
Mechanical 1:
  circle w0.5: c-807.01,0.08 r39.37
  circle w0.5: c807.16,0.08 r39.37
  circle w0.5: c-551.1,-551.1 r39.37
  circle w0.5: c551.26,-551.1 r39.37
  circle w0.5: c551.26,551.26 r39.37
  circle w0.5: c-551.1,551.26 r39.37
  lines w0.5: -196.77,0.08 0.08,0.08 0.08,-196.77 ; -604.88,647.16 cw(c-551.1,589.64) -472.36,589.64 -472.36,334.72 ccw(c-393.62,334.72) -393.62,255.98 393.78,255.98 ccw(c393.78,334.72) 472.52,334.72 472.52,589.64 cw(c551.26,589.64) 605.03,647.16 cw(c0.08,0.08) -604.88,647.16